# EAGLE board pwrfet (EAGLE 4.13)
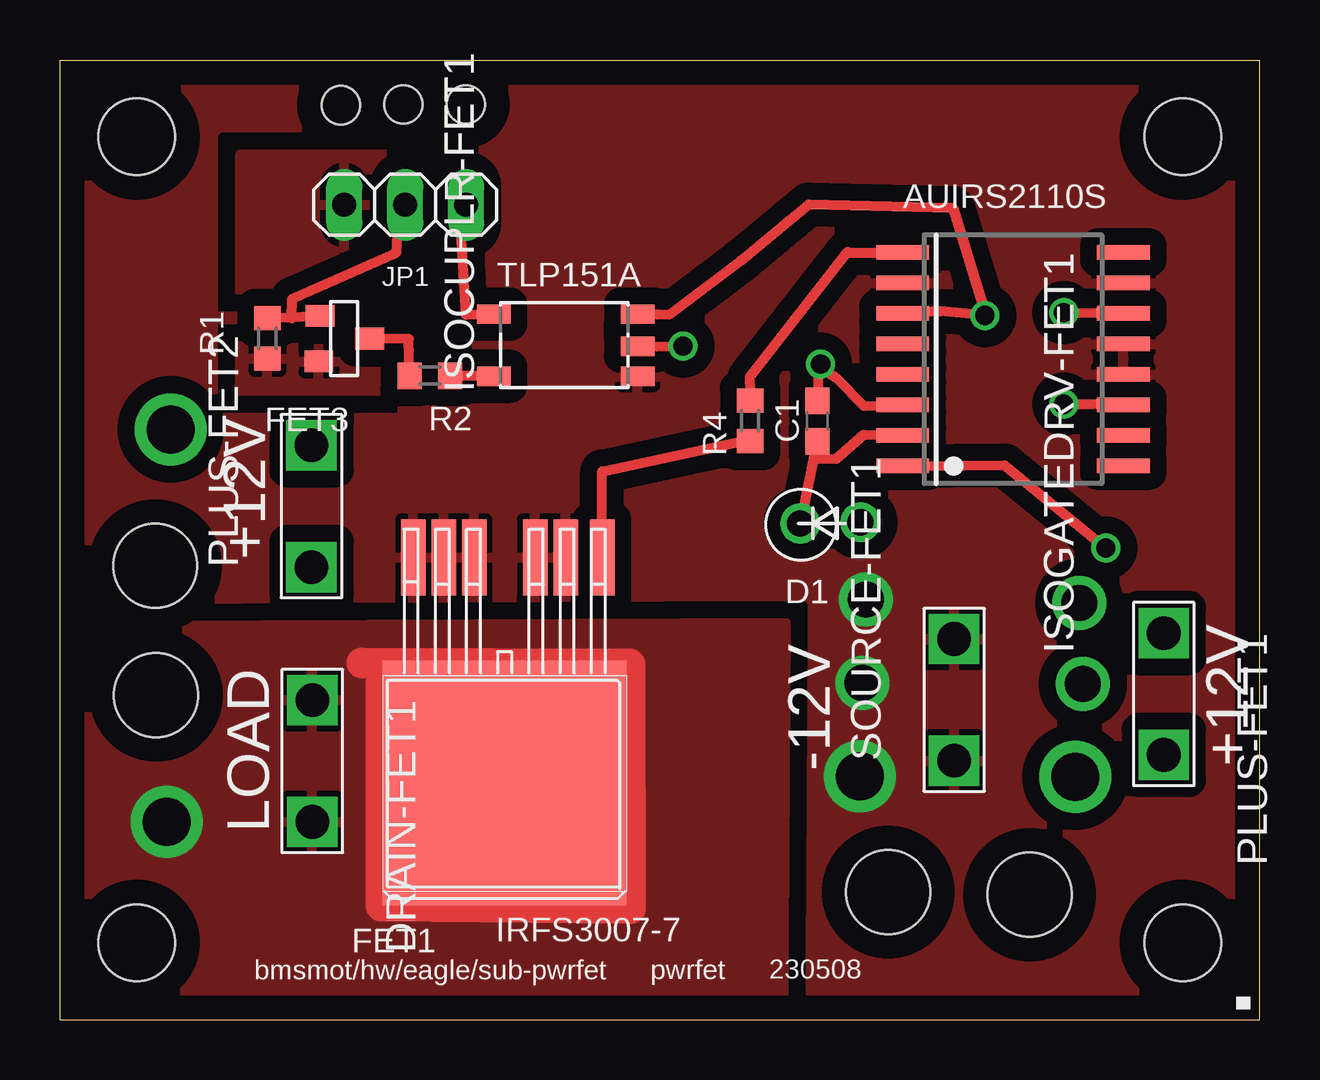
[diagram p0: board, top side]
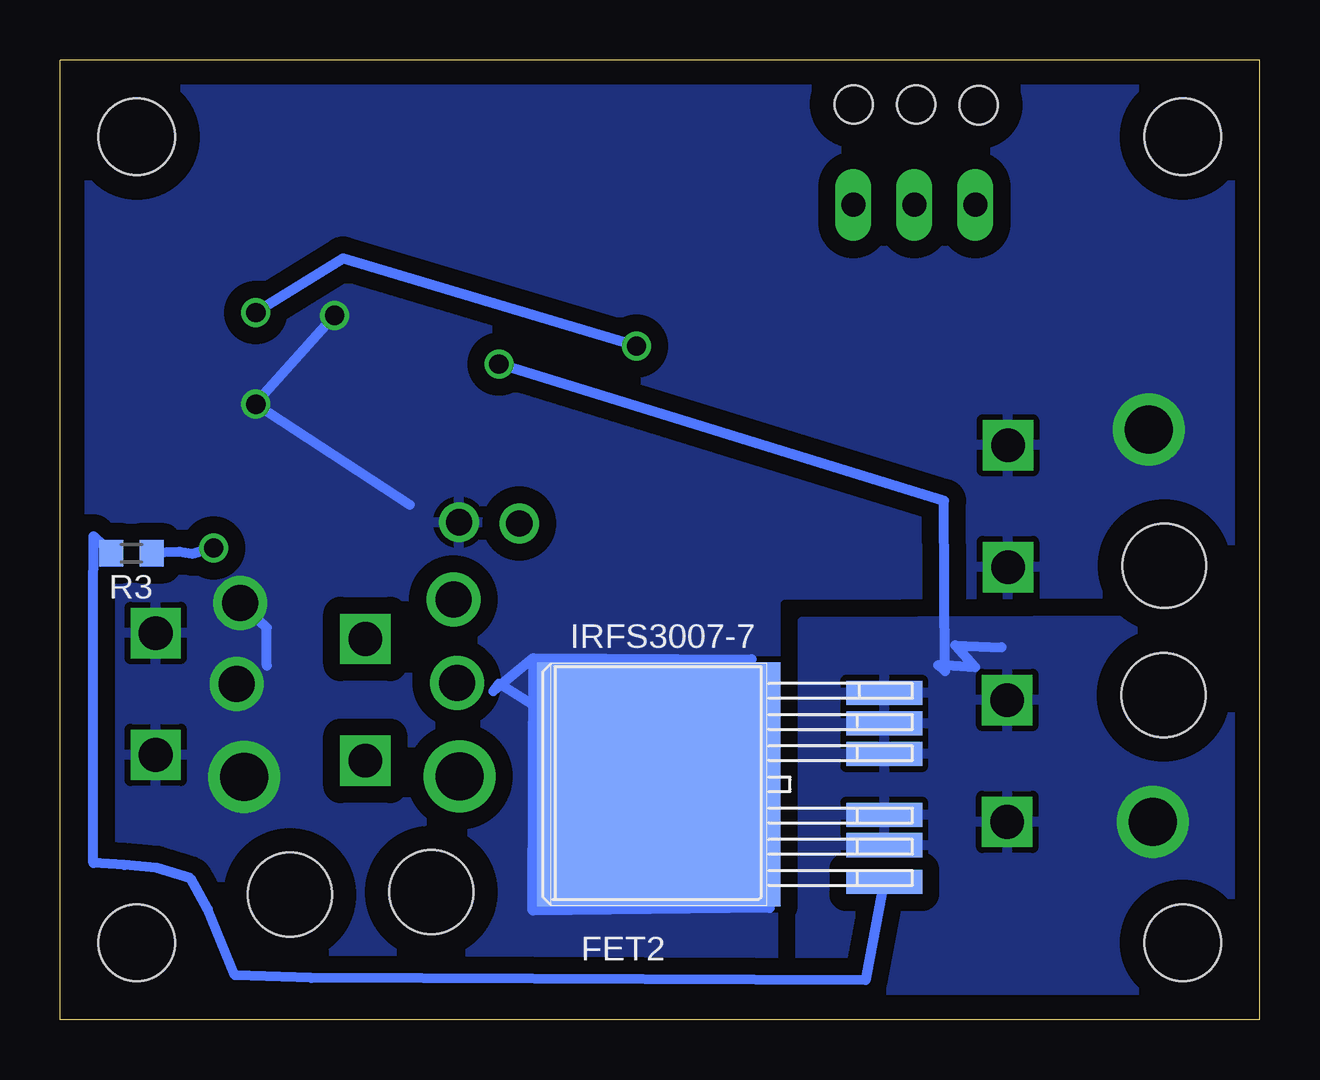
[diagram p1: board, bottom side, seen from below]

Size 50 x 40 mm. Coordinates in mm from the lower left corner, seen from the top.
Outline: 0,40 50,40 50,0 0,0 0,40
Copper layers (1*16): Top 0.035mm / dielectric 1.5mm / Bottom 0.035mm
Design rules "default": minimum track width 10mil, minimum drill 24mil, track to track 8mil, track to pad 8mil, pad to pad 8mil, via to via 8mil, smd to smd 8mil, copper to edge 40mil, drill to drill 8mil, minimum pad ring 10mil, minimum via ring 8mil, stop-mask expansion 4mil, vias tented up to drill 0mil, thermal gap 10mil
Net classes: 0 default: width 0.406 mm, clearance 0.711 mm
Holes 3.2 mm at 3.2,3.2 46.8,3.2 3.2,36.8 46.8,36.8
Holes 3.5 mm at 40.42,5.2 3.97,18.92 4.01,13.53 34.52,5.32
Holes 1.6 mm at 11.71,38.11 14.31,38.14 16.92,38.15

## Footprints (pad centres in the part's own frame; a part is rotated, then mirrored left to right if it is on the bottom)
C0603 = smd 1.1 x 1: 1 -0.85,0; 2 0.85,0
DO41-10_VERT = drill 1.1 round: A 2.58,0.05; C 0.07,0
SPADE_TAB = drill 1.4 square: G1 -2.54,0; G2 2.54,0
D2PAK-7 = smd 10.16 x 10.16: D 0,4.572 | smd 1.016 x 3.175: G -4.064,-4.826; S2 -2.54,-4.826; S3 -1.27,-4.826; S5 1.27,-4.826; S6 2.54,-4.826; S7 3.81,-4.826
SOT-23 = smd 0.9 x 1.2: 1 -1,-1.006; 2 0.9,-1.056; 3 -0.05,1.056
SOT23-5X = smd 0.8 x 1.4: 1 1.35,2.97; 3 -1.25,2.97; 4 -1.25,-3.03; 5 0,-3.03; 6 1.35,-3.03
SO-16DW = smd 0.6 x 2.2: 1 -4.445,-4.6; 2 -3.175,-4.6; 3 -1.905,-4.6; 4 -0.635,-4.6; 5 0.635,-4.6; 6 1.905,-4.6; 7 3.175,-4.6; 8 4.445,-4.6; 9 4.445,4.6; 10 3.175,4.6; 11 1.905,4.6; 12 0.635,4.6; 13 -0.635,4.6; 14 -1.905,4.6; 15 -3.175,4.6; 16 -4.445,4.6
1X03 = drill 1 long: 1 -2.54,0; 2 0,0; 3 2.54,0
R0603 = smd 1 x 1.1: 1 -0.85,0; 2 0.85,0

## Placement (x,y rotation side)
C1  4.7u  [C0603]  31.58,24.95 90 top
D1  1N4148  [DO41-10_VERT]  30.79,20.68 0 top
DRAIN-FET1  [SPADE_TAB]  10.52,10.78 270 top
FET1  IRFS3007-7  [D2PAK-7]  18.54,14.43 180 top
FET2  IRFS3007-7  [D2PAK-7]  20.47,9.8 90 bottom
FET3  NFET  [SOT-23]  11.84,28.33 270 top
ISOCUPLR-FET1  TLP151A  [SOT23-5X]  21.05,28.06 90 top
ISOGATEDRV-FET1  AUIRS2110S  [SO-16DW]  39.73,27.53 270 top
JP1  [1X03]  14.39,33.96 0 top
PLUS-FET1  [SPADE_TAB]  46.01,13.57 270 top
PLUS-FET2  [SPADE_TAB]  10.49,21.4 90 top
R1  470K  [R0603]  8.64,28.39 90 top
R2  560  [R0603]  15.42,26.84 0 top
R3  6.8  [R0603]  47.02,19.44 180 bottom
R4  6.8  [R0603]  28.77,24.96 270 top
SOURCE-FET1  [SPADE_TAB]  37.27,13.32 90 top

## Library data of the parts
C1 R1-R4 = rcl
D1 = diode
DRAIN-FET1 PLUS-FET1 PLUS-FET2 SOURCE-FET1 = DEH
FET1-FET3 = transistor-fet
ISOCUPLR-FET1 ISOGATEDRV-FET1 = texas
JP1 = pinhead

## Nets
+5V: ISOCUPLR-FET1.1 JP1.3
+PWR: D1.A FET2.D ISOCUPLR-FET1.6 ISOGATEDRV-FET1.3 ISOGATEDRV-FET1.11 PLUS-FET1.G1 PLUS-FET1.G2 PLUS-FET2.G1 PLUS-FET2.G2
DRAINFET1: C1.2 DRAIN-FET1.G1 DRAIN-FET1.G2 FET1.D FET2.S2 FET2.S3 FET2.S5 FET2.S6 FET2.S7 ISOGATEDRV-FET1.6
GATE-FET1: FET1.G R4.2
GATEDRV-FET1: ISOGATEDRV-FET1.1 R4.1
GND: FET3.2 JP1.1 R1.1
GNDA: FET1.S2 FET1.S3 FET1.S5 FET1.S6 FET1.S7 ISOCUPLR-FET1.4 ISOGATEDRV-FET1.2 ISOGATEDRV-FET1.12 ISOGATEDRV-FET1.13 ISOGATEDRV-FET1.15 SOURCE-FET1.G1 SOURCE-FET1.G2
HO: ISOGATEDRV-FET1.8 R3.1
ISO-IN-DRAIN-FET1: FET3.3 R2.1
ISOINFET1: ISOCUPLR-FET1.3 R2.2
ISOSIG-FET1: ISOCUPLR-FET1.5 ISOGATEDRV-FET1.14
N$1: FET2.G R3.2
N$2: C1.1 D1.C ISOGATEDRV-FET1.7
ONOFF-FET1: FET3.1 JP1.2 R1.2

## Tracks (layer width: path | path; a pad name or v marks a point on that pad's centre or on a via)
+5V
  Top 0.406: ISOCUPLR-FET1.1 16.93,29.39 16.64,34.22 JP1.3
+PWR  (via drill 0.8, 1.5, 2)
  Top 0.406: v41.84,25.65 43.03,25.65 44.49,25.67 ISOGATEDRV-FET1.11 | ISOCUPLR-FET1.6 24.96,29.4 25.4,29.39 28.39,31.64 31.21,33.98 37.22,33.84 38.44,29.81 v38.55,29.35 38.65,29.34 36.68,29.52 ISOGATEDRV-FET1.3
  Bottom 0.406: 35.42,21.46 v41.84,25.65 41.86,25.65 v38.55,29.35 | D1.A 33.36,20.67 | 30.27,15.06 21.16,15.01 | 30.27,15.06 30.3,4.53 20.42,4.65 | v42.49,17.38 41.38,16.34 41.38,14.76 | FET2.D 31.7,14 31.94,13.69 30.27,15.06
  other vias: 42.32,10.11 4.61,24.6 42.64,13.99
  pour Bottom (rank 3): -1.34,-1.99 -1.45,40.89 51.1,40 51.24,-2.36
DRAINFET1  (via drill 0.8, 2)
  Top 0.406: ISOGATEDRV-FET1.6 33.51,25.58 32.32,26.78 31.61,27.22 | 31.61,27.22 C1.2 | v31.71,27.32 31.61,27.22
  Top 1.27: 12.58,14.87 23.76,14.81 23.79,4.62 13.39,4.71 13.39,14.78
  Bottom 0.406: v31.71,27.32 13.15,21.62 13.11,14.52 13.39,14.78 11.86,14.68 12.68,15.6 10.75,15.52
  other vias: 4.45,8.25
  pour Top (rank 2): 30.24,16.55 30.14,0.18 -1.46,-1.21 -2.2,6.45 2.69,16.42 4.07,16.42
  pour Bottom (rank 2): 19.17,0.59 -0.02,-1.16 -0.13,5.31 -0.2,16.66 19.06,16.57
GATE-FET1
  Top 0.406: FET1.G 22.6,22.85 28.85,24.19 R4.2
GATEDRV-FET1
  Top 0.406: R4.1 28.81,25.56 28.76,26.78 32.83,32 32.82,32 32.82,31.97 ISOGATEDRV-FET1.1
GND
  pour Top (rank 2): 19.92,36.12 19.92,26.21 7.51,26.18 7.51,36.07
GNDA  (via drill 1.5, 2)
  other vias: 33.6,17.5 33.35,10.13 33.46,14.03
  pour Top (rank 3): -1.97,41.09 19.27,41.02 51.02,40.42 50.64,-2.37 -1.37,-2.17 -1.44,16.74
HO  (via drill 0.8)
  Top 0.406: ISOGATEDRV-FET1.8 39.37,23.11 v43.59,19.66
  Bottom 0.406: v43.59,19.66 44.48,19.41 45.03,19.5 R3.1
ISO-IN-DRAIN-FET1
  Top 0.406: 14.48,26.82 R2.1 14.54,28.37 FET3.3
ISOINFET1
  Top 0.406: ISOCUPLR-FET1.3 18.09,26.84 R2.2
ISOSIG-FET1  (via drill 0.8)
  Top 0.406: ISOCUPLR-FET1.5 v25.97,28.08 | ISOGATEDRV-FET1.14 v41.84,29.47
  Bottom 0.406: v25.97,28.08 38.21,31.73 v41.84,29.47
N$1
  Bottom 0.406: FET2.G 16.41,1.64 39.52,1.74 42.71,1.85 43.84,4.6 44.56,5.88 45.99,6.33 47.31,6.44 48.61,6.53 48.62,17.32 48.6,20.14 R3.2
N$2
  Top 0.406: ISOGATEDRV-FET1.7 33.51,24.38 32.35,23.36 31.51,23.39 C1.1 30.86,20.61 D1.C
ONOFF-FET1
  Top 0.406: FET3.1 10.88,29.33 9.66,29.29 | R1.2 9.66,29.29 | 9.66,29.29 9.66,29.22 9.68,30.04 14.03,31.98 14.15,34.22 JP1.2

## Text on the board
tNames: AUIRS2110S | TLP151A | +12V | -12V | +12V | LOAD | IRFS3007-7 | bmsmot/hw/eagle/sub-pwrfet | pwrfet | 230508
bNames: IRFS3007-7